# Altium PCB PMOD_LEVELSHIFT.PcbDoc
Units mil, origin at the board's own origin, x right, y up, seen from the top; angles counter-clockwise.
Board outline 3910 x 1850 mil, 2 copper layers (Top Layer, Bottom Layer); 12 components, 14 nets, 76 pads, 1 vias.
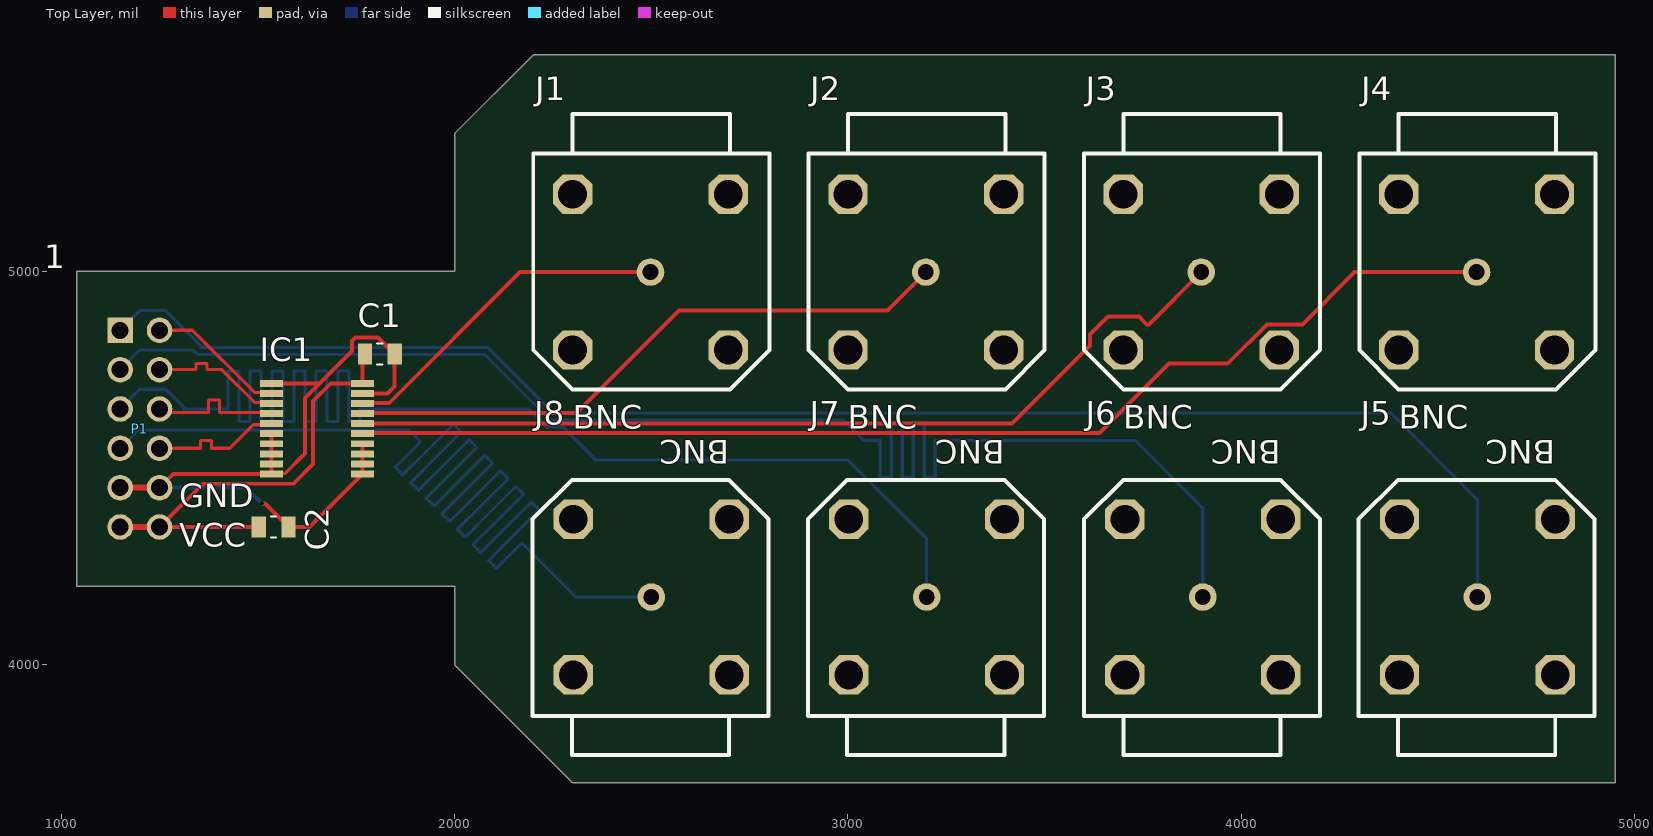
[diagram p0: Top Layer view]
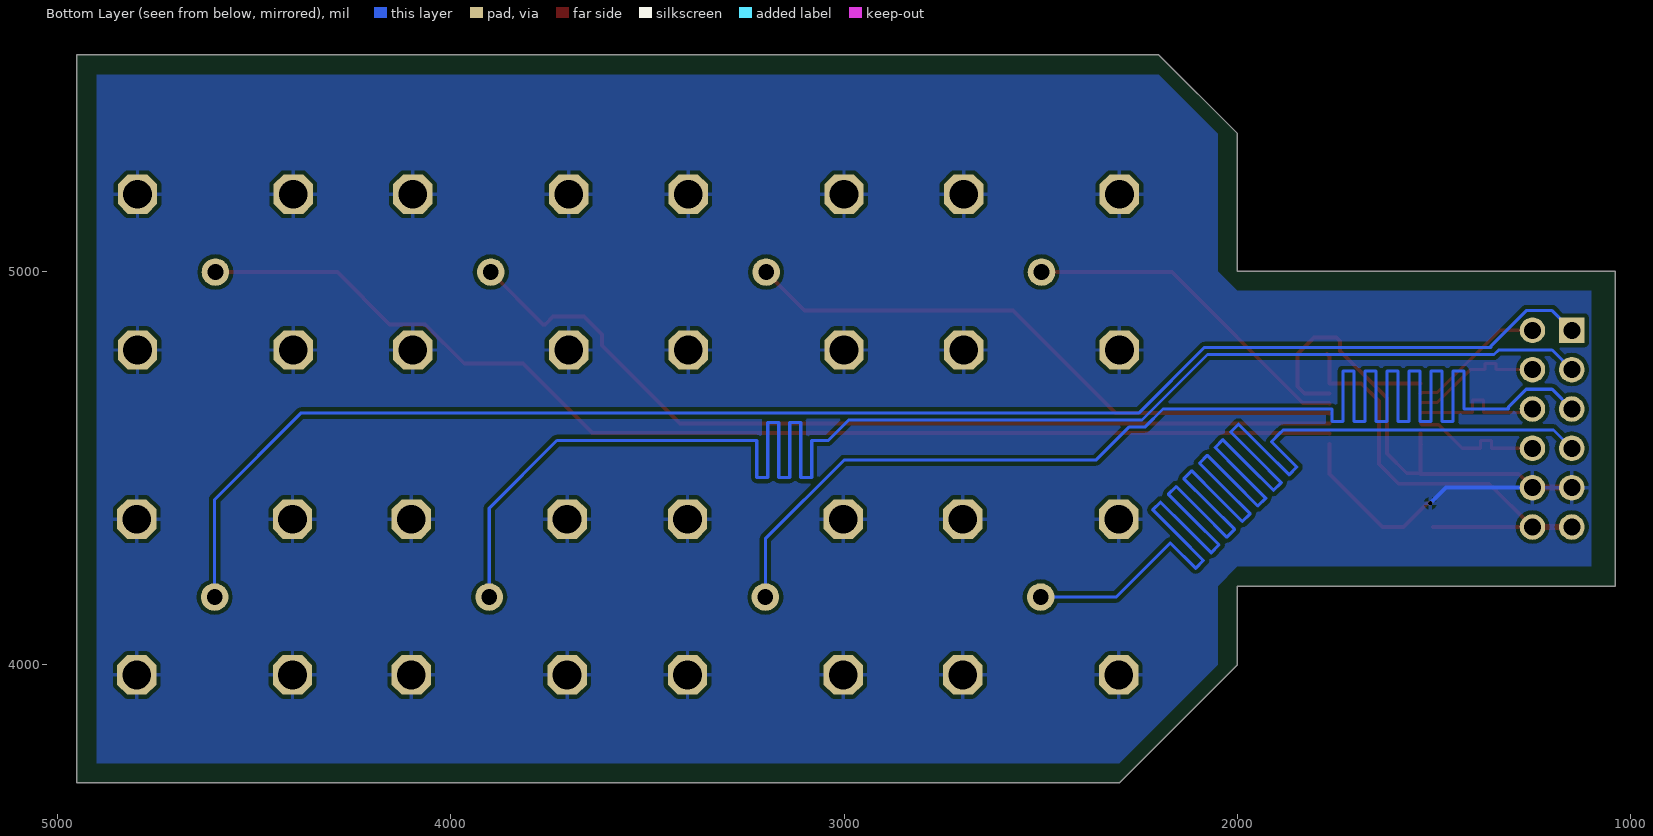
[diagram p1: Bottom Layer view, seen from below]

## Layer stack, top to bottom
Top Solder: solder mask 0.4, Solder Resist, Dk 3.5
Top Layer: signal copper 1.4
Dielectric 1: dielectric 12.6, FR-4, Dk 4.8
Bottom Layer: signal copper 1.4
Bottom Solder: solder mask 0.4, Solder Resist, Dk 3.5

## Board outline
1040,4200 1040,5000 2000,5000 2000,5350 2200,5550 4950,5550 4950,3700 2300,3700 2000,4000 2000,4200

## Design rules (kind name [scope] priority, off if disabled: settings)
Clearance [All] p1: gap=10 ignorepadtopadclearanceinfootprint=TRUE except(0: Arc-Hole Track-Hole SMDPad-Hole THPad-Hole Via-Hole Fill-Hole Poly-Hole Region-Hole Text-Hole)
HoleSize [All] p1: absolutevalues=TRUE maxlimit=100 minlimit=11.81 maxpercent=80.000 minpercent=20.000
MatchedLengths MatchLengths_xSignals_P1_J5,J6,J7,J8 [InxSignalClass('xSignals_P1_J5,J6,J7,J8_MatchLengthsClass')] p1: tolerance=100 checknetsindiffpair=FALSE checkdiffpairvsdiffpair=TRUE checkxsignals=TRUE checkothers=TRUE
MatchedLengths MatchLengths_xSignals_P1_IC1 [InxSignalClass('xSignals_P1_IC1_MatchLengthsClass')] p2: tolerance=100 checknetsindiffpair=FALSE checkdiffpairvsdiffpair=TRUE checkxsignals=TRUE checkothers=TRUE
PolygonConnect [All] p1: connectstyle=Relief reliefconductorwidth=10 reliefentries=4 polygonreliefangle="90 Angle" airgapwidth=10
RoutingVias [All] p1: holewidth=14 width=25 viastyle="Through Hole" minholewidth=5 minwidth=10 maxholewidth=28 maxwidth=50
SolderMaskExpansion [All] p1: expansion=4
Width Main [All] p1: maxlimit=15 minlimit=5 preferedwidth=15 minimp=50.000000 maximp=50.000000 favimp=50.000000
Width Signal [All] p2: maxlimit=10 minlimit=10 preferedwidth=10
29 further rules are at their usual default settings.

## Components (designator, comment, footprint, x,y, rotation, side; value= is the part's Value field where it differs from the comment)
C1 "" *RESC2012X60N 1810,4789.74 r180 top value=100nF
C2 "" *RESC2012X60N 1540,4350 r180 top value=100nF
IC1 "Texas Instruments SN74LV245APWR, Bus Transceiver, 8-Bit Non-Inverting LVTTL, 2  5.5 V, 20-Pin TSSOP   Source:  Datasheet" SOP65P640X120-20N 1650,4600 r0 top
J1 "BNC_CON" BNC_CON 2300,4800 r0 top
J2 "BNC_CON" BNC_CON 3000,4800 r0 top
J3 "BNC_CON" BNC_CON 3700,4800 r0 top
J4 "BNC_CON" BNC_CON 4400,4800 r0 top
J5 "BNC_CON" BNC_CON 4798,4369.99 r180 top
J6 "BNC_CON" BNC_CON 4100,4369.99 r180 top
J7 "BNC_CON" BNC_CON 3398,4369.99 r180 top
J8 "BNC_CON" BNC_CON 2698,4369.99 r180 top
P1 "" HDRRA12W64P254_2X6_1524X254X61 1150,4850 r270 top

## Footprints (in the part's own frame and the unit in brackets; to place one, negate y for a bottom-side part, rotate by r counter-clockwise, add the part's x,y. Pads: shape width x height; smd on the part's side, far side on the other; paste and mask are expansions set on the pad)
*RESC2012X60N [mm]
  rect 0.92x1.38 smd: 1(-0.955,0) 2(0.955,0)
  silkscreen extent -0.17,-0.68 0.17,0.68
BNC_CON [mil]
  oct 100x100 hole 73: 0(0,0) 0(0,396) 0(396,0) 0(396,396)
  round 70 hole 40: 1(198,198)
  silkscreen extent -100,-100 500,600
HDRRA12W64P254_2X6_1524X254X61 [mm]
  rect 1.65x1.65 hole 1.1: 1(0,0)
  round 1.65 hole 1.1: 2(0,2.54) 3(2.54,0) 4(2.54,2.54) 5(5.08,0) 6(5.08,2.54) 7(7.62,0) 8(7.62,2.54) 9(10.16,0) 10(10.16,2.54) 11(12.7,0) 12(12.7,2.54)
SOP65P640X120-20N [mil]
  rect 58.07x17.72 smd: 1(-115.67,115.16) 2(-115.67,89.57) 3(-115.67,63.98) 4(-115.67,38.39) 5(-115.67,12.8) 6(-115.67,-12.8) 7(-115.67,-38.39) 8(-115.67,-63.98) 9(-115.67,-89.57) 10(-115.67,-115.16) 11(115.67,-115.16) 12(115.67,-89.57) 13(115.67,-63.98) 14(115.67,-38.39) 15(115.67,-12.8) 16(115.67,12.8) 17(115.67,38.39) 18(115.67,63.98) 19(115.67,89.57) 20(115.67,115.16)

## Part data
C1 C2: library part "Cap Semi", "Capacitor (Semiconductor SIM Model)", LatestRevisionDate=29-May-2009, LatestRevisionNote="IPC-7351 Footprint Added.", PackageDescription="Chip Capacitor", PackageReference=C1206, Published=8-Jun-2000, Publisher="Altium Limited"
IC1: library part SN74LV245APWR, Manufacturer_Name="Texas Instruments", Height=1.2mm, Manufacturer_Part_Number=SN74LV245APWR, RS_Part_Number=6628483P, RS_Price-Stock=http://uk.rs-online.com/web/p/products/6628483P
P1: library part "Header 6X2H", "Header, 6-Pin, Dual row, Right Angle", LatestRevisionDate=17-Jul-2002, LatestRevisionNote="Re-released for DXP Platform.", Publisher="Altium Limited"

## Via types
v1: diameter 11.81, hole 11.81, Top Layer to Bottom Layer, 1 vias

## Nets (pads, with @x,y where several pads share a name; then routed paths per layer and width w, separated by ;. In a path a pad name is that pad's centre, name@x,y a point inside that pad or via, vN(x,y) a via of type N, cw(c..) or ccw(c..) an arc to the next point about the centre after c; other vN are vias at no path point)
GND: C1.1 C2.1 IC1.1 IC1.6 IC1.7 IC1.8 IC1.9 IC1.10 IC1.11 IC1.12 IC1.13 IC1.14 IC1.19 J1.0 J2.0 J3.0 J4.0 J5.0 J6.0 J7.0 J8.0 P1.9 P1.10 | length 2058.8
  Top Layer w8: IC1.7@1532.72,4560 IC1.7 ; IC1.9@1533.9,4510 IC1.9
  Top Layer w10: P1.10 1284.84,4484.84 IC1.10 ; v1(1510,4410) 1517.6,4410 C2.1 1630.83,4350 IC1.11 IC1.12 IC1.13 IC1.14 ; IC1.7@1532.72,4560 1534.33,4558.39 IC1.8 IC1.9 ; IC1.9@1533.9,4510 1534.33,4509.57 IC1.10 ; IC1.7 IC1.6 ; IC1.1 1656.88,4715.16 ; IC1.19 1829.57,4689.57 1847.6,4707.6 C1.1 1805.43,4831.9 1748.08,4831.9 1739.29,4823.12 1739.29,4797.58 1656.88,4715.16 ; IC1.10 1536.06,4486.57 1569.58,4486.57 1620,4536.99 1620,4678.28 1656.88,4715.16
  Top Layer w15: P1.9 P1.10
  Bottom Layer w10: P1.10 1470,4450 v1(1510,4410)
NetIC1_2: IC1.2 P1.2 | length 350.8
  Top Layer w8: P1.2 1333.6,4850 1491.3,4692.3 1531.6,4692.3 IC1.2@1532.6,4691.3
  Top Layer w10: IC1.2@1532.6,4691.3 IC1.2
NetIC1_3: IC1.3 P1.4 | length 350.8
  Top Layer w8: P1.4 1329.07,4750 1343.07,4750 1343.07,4765.41 1371.07,4765.41 1371.07,4750 1408.14,4750 1491.43,4666.71 1531.6,4666.71 IC1.3
NetIC1_4: IC1.4 P1.6 | length 358.3
  Top Layer w8: P1.6 1250,4641.12 1360,4641.12 1374,4641.12 1374,4673.1 1402,4673.1 1402,4641.12 1420,4641.12 1531.6,4641.12 IC1.4
NetIC1_5: IC1.5 P1.8 | length 350.8
  Top Layer w8: P1.8 1340,4550 1354,4550 1354,4570.22 1382,4570.22 1382,4550 1428.59,4550 1488.65,4610.06 1531.59,4610.06 IC1.5
NetIC1_15: IC1.15 J4.1 | length 3002.5
  Top Layer w10: IC1.15 1767.41,4588.94 3638.94,4588.94 3815.71,4765.71 3965.5,4765.71 4064.79,4865 4155,4865 4288,4998 J4.1
NetIC1_16: IC1.16 J3.1 | length 2325
  Top Layer w10: IC1.16 3416.59,4612.8 3615,4811.21 3615,4839.5 3660.5,4885 3739.5,4885 3759.5,4865 3765,4865 J3.1
NetIC1_17: IC1.17 J2.1 | length 1581.3
  Top Layer w10: IC1.17 1767.4,4640.12 2310.12,4640.12 2570,4900 3100,4900 J2.1
NetIC1_18: IC1.18 J1.1 | length 870.7
  Top Layer w10: IC1.18 1767.4,4665.71 1833.99,4665.71 2166.28,4998 J1.1
OUT0: J5.1 P1.1 | length 3920
  Bottom Layer w8: P1.1 1200,4900 1265.73,4900 1355.08,4810.65 1355.08,4806.47 2083.53,4806.47 2250,4640 4380,4640 4600,4420 J5.1
OUT1: J6.1 P1.3 | length 3937.7
  Bottom Layer w8: P1.3@1168.03,4731.97 P1.3 1200,4800 1336.1,4800 1347.63,4788.47 2076.07,4788.47 2242.54,4622 2988,4622 3040,4570 3054,4570 3082,4570 3082,4476.11 3110,4476.11 3110,4570 3110,4615.9 3138,4615.9 3138,4570 3138,4476.11 3166,4476.11 3166,4570 3166,4615.9 3194,4615.9 3194,4570 3194,4476.11 3222,4476.11 3222,4570 3420,4570 3730,4570 3902,4398 J6.1
OUT2: J7.1 P1.5 | length 3912.2
  Bottom Layer w8: P1.5 1200,4700 1265.73,4700 1311.56,4654.18 1311.56,4650 1410,4650 1424,4650 1424,4746.14 1452,4746.14 1452,4650 1452,4618.34 1480,4618.34 1480,4650 1480,4746.14 1508,4746.14 1508,4650 1508,4618.34 1536,4618.34 1536,4650 1536,4746.14 1564,4746.14 1564,4650 1564,4618.34 1592,4618.34 1592,4650 1592,4746.14 1620,4746.14 1620,4650 1620,4618.34 1648,4618.34 1648,4650 1648,4746.14 1676,4746.14 1676,4650 1676,4618.34 1704,4618.34 1704,4650 1704,4746.14 1732,4746.14 1732,4650 1732,4618.34 1760,4618.34 1760,4650 1900,4650 2189.09,4650 2235.09,4604 2276,4604 2360,4520 3000,4520 3200,4320 J7.1
OUT3: J8.1 P1.7 | length 3912.2
  Bottom Layer w8: P1.7 1196.48,4596.48 1883.52,4596.48 1893.42,4586.58 1913.22,4566.78 1848.84,4502.4 1868.64,4482.61 1933.02,4546.98 1997.39,4611.36 2017.19,4591.56 1952.82,4527.18 1888.44,4462.81 1908.24,4443.01 1972.62,4507.38 2036.99,4571.76 2056.79,4551.96 1992.41,4487.59 1928.04,4423.21 1947.84,4403.41 2012.21,4467.79 2076.59,4532.16 2096.39,4512.36 2032.01,4447.99 1967.64,4383.61 1987.43,4363.81 2051.81,4428.19 2116.19,4492.57 2135.99,4472.77 2071.61,4408.39 2007.23,4344.01 2027.03,4324.21 2091.41,4388.59 2155.79,4452.97 2175.59,4433.17 2111.21,4368.79 2046.83,4304.41 2066.63,4284.62 2131.01,4348.99 2195.38,4413.37 2215.18,4393.57 2150.81,4329.19 2086.43,4264.82 2106.23,4245.02 2170.61,4309.39 2308.01,4171.99 J8.1
VCC: C1.2 C2.2 IC1.20 P1.11 P1.12 | length 1190.4
  Top Layer w10: C2.2 P1.12 1360,4460 1590,4460 1640,4510 1640,4670 1685.16,4715.16 IC1.20 1765.67,4783.01 C1.2
  Top Layer w15: P1.11 P1.12

## Polygon pours and split planes (outlines as drawn)
GND on Bottom Layer "Bottom Layer-No Net" (solid, pour order 2): 1100,4950 1100,4250 2000,4250 2050,4200 2050,4000 2300,3750 4900,3750 4900,5500 2200,5500 2050,5350 2050,5000 2000,4950

## Silkscreen, mask and mechanical layers (free items; w line width, h text height)
Top Overlay:
  text "GND" at 1300,4400 h60
  text "VCC" at 1300,4300 h60
BOARD_OUTLINE:
  the board outline again, w10

## Text inside footprints (layer, text, board x,y; h text height)
J1: Top Overlay "BNC" at 2300,4600 h60
J2: Top Overlay "BNC" at 3000,4600 h60
J3: Top Overlay "BNC" at 3700,4600 h60
J4: Top Overlay "BNC" at 4400,4600 h60
J5: Top Overlay "BNC" at 4798,4569.99 h60 r180
J6: Top Overlay "BNC" at 4100,4569.99 h60 r180
J7: Top Overlay "BNC" at 3398,4569.99 h60 r180
J8: Top Overlay "BNC" at 2698,4569.99 h60 r180